# Altium PCB ASCII-romulator-pvt1.PcbDoc
Units mm, origin at the board's own origin, x right, y up, seen from the top; angles counter-clockwise.
Board outline 47.91 x 89.35 mm, 2 copper layers (Top Layer, Bottom Layer); 9 components, 64 nets, 749 pads, 102 vias.
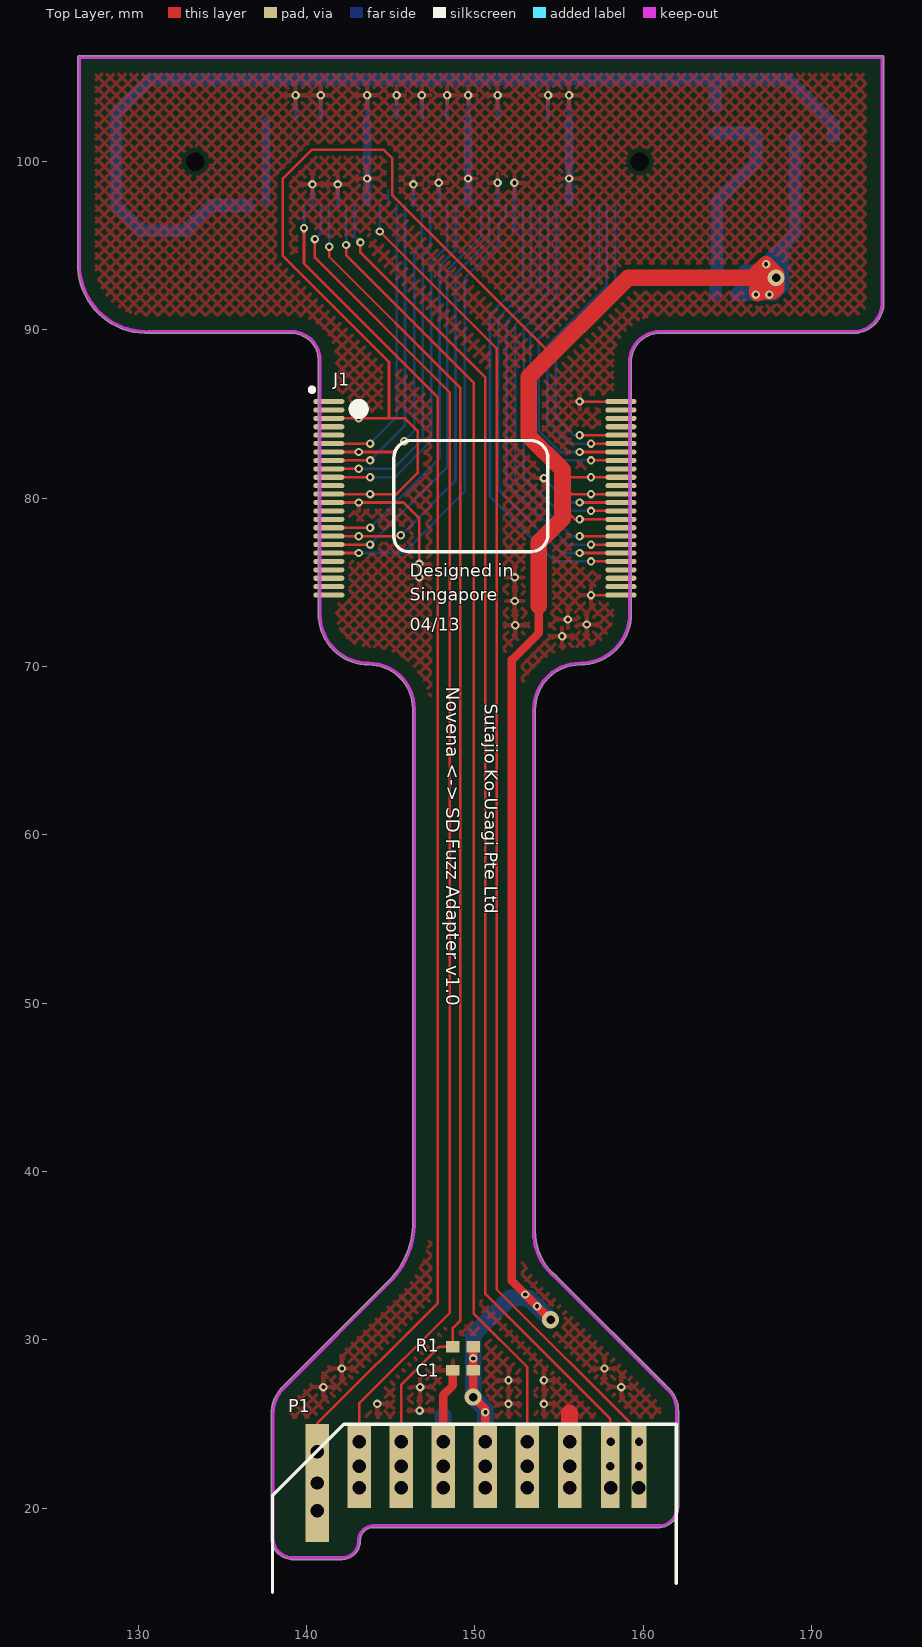
[diagram p0: Top Layer view]
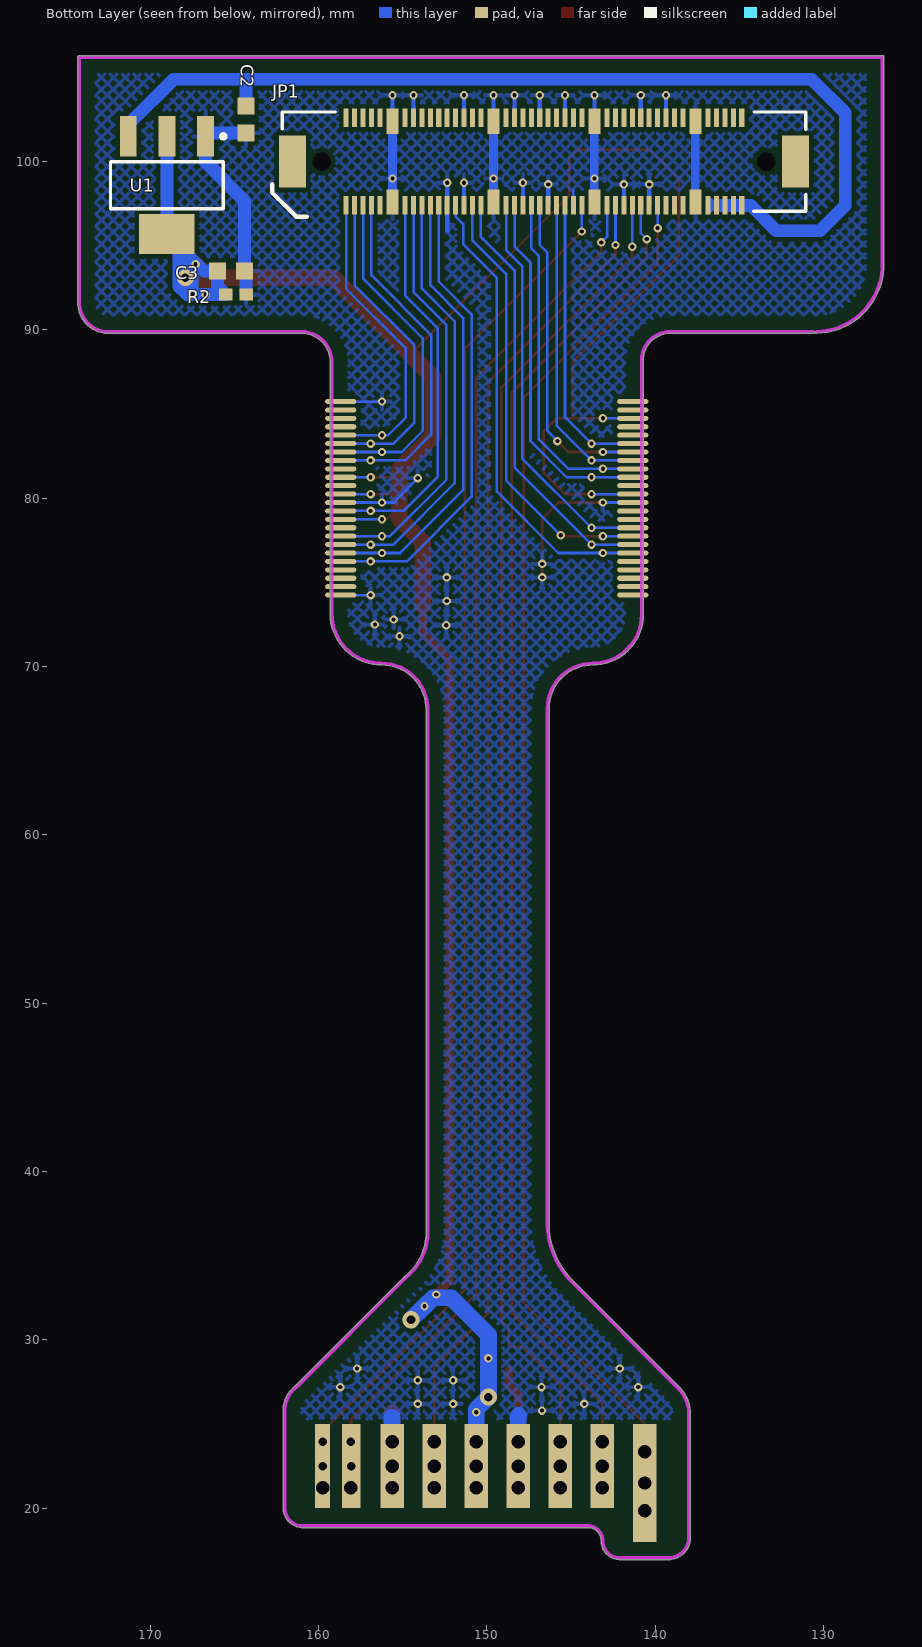
[diagram p1: Bottom Layer view, seen from below]

## Layer stack, top to bottom
Top Solder: solder mask 0.0102, Solder Resist, Dk 3.5
Top Layer: signal copper 0.0356
Dielectric1: dielectric 0.32, FR-4, Dk 4.8
Bottom Layer: signal copper 0.0356
Bottom Solder: solder mask 0.0102, Solder Resist, Dk 3.5

## Board outline
137.9,18.25 137.9,25.6 cw(c138,25.6) 137.9,25.601 cw(c140.234,25.576) 138.63,27.272 cw(c140.234,25.576) 138.631,27.273 138.629,27.271 145.027,33.669 ccw(c141.403,36.966) 146.3,36.802 146.3,67.5 ccw(c143.7,67.5) 143.7,70.1 cw(c143.7,73.1) 140.7,73.1 140.7,88.2 ccw(c139.1,88.2) 139.1,89.8 130.6,89.8 cw(c130.6,89.9) 130.5,89.891 cw(c130.4,89.9) 130.397,89.8 cw(c130.5,93.9) 126.4,94.001 cw(c130.5,93.9) 126.4,94.003 126.4,94 126.4,106.2 cw(c126.5,106.2) 126.5,106.3 174.2,106.3 cw(c174.2,106.2) 174.3,106.2 174.3,91.804 cw(c172.45,91.65) 174.307,91.65 cw(c172.45,91.65) 172.609,89.8 cw(c172.6,89.9) 172.6,89.8 161,89.8 ccw(c161,88.1) 159.3,88.1 159.3,73.15 cw(c159.2,73.15) 159.3,73.149 ccw(c156.25,73.15) 159.3,73.15 159.3,73.149 cw(c156.25,73.15) 156.251,70.1 cw(c156.25,73.15) 156.25,70.1 ccw(c156.25,70.2) 156.251,70.1 156.25,70.1 ccw(c156.25,67.45) 153.6,67.45 153.6,36.7 cw(c153.5,36.7) 153.6,36.692 cw(c157.024,36.445) 153.6,36.693 153.6,36.692 ccw(c157.024,36.445) 154.863,33.778 ccw(c157.024,36.445) 154.863,33.778 cw(c154.8,33.7) 154.871,33.771 161.367,27.275 cw(c160.195,25.771) 162.102,25.771 cw(c160.195,25.771) 162.1,25.698 162.1,20.025 cw(c160.925,20.025) 160.925,18.85 cw(c160.925,18.95) 160.924,18.85 143.929,18.85 ccw(c143.988,18.062) 143.2,18.007 cw(c143.1,18) 143.2,18 cw(c143.1,18) 143.2,17.994 cw(c142.088,18.062) 142.022,16.95 139.2,16.95 cw(c139.2,18.25)

## Design rules (kind name [scope] priority, off if disabled: settings)
AssemblyTestPointUsage [All] p0 off: scope1count=1 scope1_0_kind=Board scope1_0_value=Board scope2count=1 scope2_0_kind=Board scope2_0_value=Board commentlength=0
AssemblyTestPointUsage [All] p1 off:
AssemblyTestpoint [All] p0 off: scope1count=1 scope1_0_kind=Board scope1_0_value=Board scope2count=1 scope2_0_kind=Board scope2_0_value=Board commentlength=0
AssemblyTestpoint [All] p1 off: testpointundercomponent=TRUE minsize=1.016 maxsize=2.54 preferedsize=1.524 minholesize=0 maxholesize=1.016 preferedholesize=0.813 testpointgrid=0.025 usegrid=TRUE gridtolerance=0 allowsidetop=TRUE allowsidebottom=TRUE
Clearance Clearance_KO [All] p0: scope1count=1 scope1_0_kind=Layer scope1_0_value=TOP scope2count=1 scope2_0_kind=Board scope2_0_value=Board commentlength=0 gap=0.8
Clearance Clearance_poly_ko [All] p0 off: scope1count=1 scope1_0_kind=Board scope1_0_value=Board scope2count=1 scope2_0_kind=Layer scope2_0_value=TOP commentlength=91 gap=0.8 // Protel DXP Scope 1 Expression Was: InNamedPolygon('botgnd') or InNamedPolygon('topgnd')
Clearance Clearance_poly [All] p0 off: scope1count=1 scope1_0_kind=Board scope1_0_value=Board scope2count=1 scope2_0_kind=Board scope2_0_value=Board commentlength=91 gap=0.254 // Protel DXP Scope 1 Expression Was: InNamedPolygon('botgnd') or InNamedPolygon('topgnd')
Clearance [All] p0: scope1count=1 scope1_0_kind=Board scope1_0_value=Board scope2count=1 scope2_0_kind=Board scope2_0_value=Board commentlength=0 gap=0.152
Clearance Clearance_poly_ko [InNamedPolygon('botgnd') or InNamedPolygon('topgnd') vs OnLayer('Keep-Out Layer')] p1: gap=0.8
Clearance Clearance_poly [InNamedPolygon('botgnd') or InNamedPolygon('topgnd')] p2: gap=0.254
Clearance Clearance_KO [OnLayer('Keep-Out Layer')] p3: gap=0.8
Clearance [All] p4: gap=0.152
ComponentClearance [All] p0: scope1count=1 scope1_0_kind=Board scope1_0_value=Board scope2count=1 scope2_0_kind=Board scope2_0_value=Board commentlength=0 gap=0.254 collisioncheckmode=3
DiffPairsRouting [All] p0: scope1count=1 scope1_0_kind=Board scope1_0_value=Board scope2count=1 scope2_0_kind=Board scope2_0_value=Board commentlength=0
FabricationTestPointUsage [All] p0: scope1count=1 scope1_0_kind=Board scope1_0_value=Board scope2count=1 scope2_0_kind=Board scope2_0_value=Board commentlength=0 valid=0 allowmultiple=FALSE
FabricationTestpoint [All] p0: scope1count=1 scope1_0_kind=Board scope1_0_value=Board scope2count=1 scope2_0_kind=Board scope2_0_value=Board commentlength=0 side=3 testpointundercomponent=TRUE minsize=1.016 maxsize=2.54 preferedsize=1.524 minholesize=0 maxholesize=1.016 preferedholesize=0.813 testpointgrid=0.025
FanoutControl Fanout_Default [All] p0: scope1count=1 scope1_0_kind=Board scope1_0_value=Board scope2count=1 scope2_0_kind=Board scope2_0_value=Board commentlength=30 // Fanout_Default (Default Rule)
FanoutControl Fanout_Small [All] p0 off: scope1count=1 scope1_0_kind=Board scope1_0_value=Board scope2count=1 scope2_0_kind=Board scope2_0_value=Board commentlength=84 // Protel DXP Scope 1 Expression Was: (CompPinCount < 5)   Fanout_Small (Default Rule)
FanoutControl Fanout_SOIC [All] p0 off: scope1count=1 scope1_0_kind=Board scope1_0_value=Board scope2count=1 scope2_0_kind=Board scope2_0_value=Board commentlength=71 // Protel DXP Scope 1 Expression Was: IsSOIC   Fanout_SOIC (Default Rule)
FanoutControl Fanout_LCC [All] p0 off: scope1count=1 scope1_0_kind=Board scope1_0_value=Board scope2count=1 scope2_0_kind=Board scope2_0_value=Board commentlength=69 // Protel DXP Scope 1 Expression Was: IsLCC   Fanout_LCC (Default Rule)
FanoutControl Fanout_BGA [All] p0 off: scope1count=1 scope1_0_kind=Board scope1_0_value=Board scope2count=1 scope2_0_kind=Board scope2_0_value=Board commentlength=69 // Protel DXP Scope 1 Expression Was: IsBGA   Fanout_BGA (Default Rule)
Height [All] p0: scope1count=1 scope1_0_kind=Board scope1_0_value=Board scope2count=1 scope2_0_kind=Board scope2_0_value=Board commentlength=0
HoleSize [All] p0: scope1count=1 scope1_0_kind=Board scope1_0_value=Board scope2count=1 scope2_0_kind=Board scope2_0_value=Board commentlength=0 absolutevalues=TRUE maxlimit=3.175 minlimit=0.25 maxpercent=80.000 minpercent=20.000
HoleSize [All] p1: absolutevalues=TRUE maxlimit=3.175 minlimit=0.25 maxpercent=80.000 minpercent=20.000
HoleToHoleClearance [All] p0: scope1count=1 scope1_0_kind=Board scope1_0_value=Board scope2count=1 scope2_0_kind=Board scope2_0_value=Board commentlength=0
LayerPairs [All] p0: scope1count=1 scope1_0_kind=Board scope1_0_value=Board scope2count=1 scope2_0_kind=Board scope2_0_value=Board commentlength=0 enforce=TRUE
MinimumSolderMaskSliver [All] p0 off: scope1count=1 scope1_0_kind=Board scope1_0_value=Board scope2count=1 scope2_0_kind=Board scope2_0_value=Board commentlength=0
MinimumSolderMaskSliver [All] p1 off: minsoldermaskwidth=0.254
NetAntennae [All] p0: scope1count=1 scope1_0_kind=Board scope1_0_value=Board scope2count=1 scope2_0_kind=Board scope2_0_value=Board commentlength=0
PasteMaskExpansion [All] p0: scope1count=1 scope1_0_kind=Board scope1_0_value=Board scope2count=1 scope2_0_kind=Board scope2_0_value=Board commentlength=0 expansion=0
PlaneClearance [All] p0: scope1count=1 scope1_0_kind=Board scope1_0_value=Board scope2count=1 scope2_0_kind=Board scope2_0_value=Board commentlength=0 clearance=0.508
PlaneConnect [All] p0: scope1count=1 scope1_0_kind=Board scope1_0_value=Board scope2count=1 scope2_0_kind=Board scope2_0_value=Board commentlength=0 planeconnectstyle=Relief reliefexpansion=0.508 reliefentries=4 reliefconductorwidth=0.254 reliefairgap=0.254
PolygonConnect [All] p0: scope1count=1 scope1_0_kind=Board scope1_0_value=Board scope2count=1 scope2_0_kind=Board scope2_0_value=Board commentlength=0 connectstyle=Relief reliefconductorwidth=0.254 reliefentries=4 polygonreliefangle="90 Angle"
PolygonConnect [All] p1: connectstyle=Relief reliefconductorwidth=0.254 reliefentries=4 polygonreliefangle="90 Angle" airgapwidth=0.254
RoomDefinition nand [All] p0 off: scope1count=1 scope1_0_kind=ComponentClass scope1_0_value=nand scope2count=1 scope2_0_kind=Board scope2_0_value=Board commentlength=0 region_x1=66338583 region_y1=10600000 region_x2=66614173 region_y2=24400000 confinementstyle=ConfineIn
RoomDefinition nand [InComponentClass('nand')] p1 off: confinementstyle=ConfineIn formatcopy=TRUE lockcomponents=FALSE outline 169.2,26.924 168.5,26.924 168.5,61.976 169.2,61.976
RoutingCorners [All] p0: scope1count=1 scope1_0_kind=Board scope1_0_value=Board scope2count=1 scope2_0_kind=Board scope2_0_value=Board commentlength=0 cornerstyle=45-Degree minsetback=2.54 maxsetback=2.54
RoutingLayers [All] p0: scope1count=1 scope1_0_kind=Board scope1_0_value=Board scope2count=1 scope2_0_kind=Board scope2_0_value=Board commentlength=0 top layer=Automatic bottom layer=Automatic
RoutingPriority [All] p0: scope1count=1 scope1_0_kind=Board scope1_0_value=Board scope2count=1 scope2_0_kind=Board scope2_0_value=Board commentlength=0
RoutingTopology [All] p0: scope1count=1 scope1_0_kind=Board scope1_0_value=Board scope2count=1 scope2_0_kind=Board scope2_0_value=Board commentlength=0 topology=Shortest
RoutingVias [All] p0: scope1count=1 scope1_0_kind=Board scope1_0_value=Board scope2count=1 scope2_0_kind=Board scope2_0_value=Board commentlength=0 holewidth=0.5 width=1 viastyle="Through Hole" minholewidth=0.25 minwidth=0.5 maxholewidth=0.5 maxwidth=1
RoutingVias [All] p1: holewidth=0.5 width=1 viastyle="Through Hole" minholewidth=0.25 minwidth=0.5 maxholewidth=0.5 maxwidth=1
ShortCircuit [All] p0: scope1count=1 scope1_0_kind=Board scope1_0_value=Board scope2count=1 scope2_0_kind=Board scope2_0_value=Board commentlength=0 allowed=FALSE
SilkToBoardRegionClearance [All] p0: scope1count=1 scope1_0_kind=Board scope1_0_value=Board scope2count=1 scope2_0_kind=Board scope2_0_value=Board commentlength=0
SilkToSilkClearance [All] p0 off: scope1count=1 scope1_0_kind=Board scope1_0_value=Board scope2count=1 scope2_0_kind=Board scope2_0_value=Board commentlength=0
SilkToSilkClearance [All] p1 off: silktosilkclearance=0.254
SilkToSolderMaskClearance [All] p0 off: scope1count=1 scope1_0_kind=Board scope1_0_value=Board scope2count=1 scope2_0_kind=Board scope2_0_value=Board commentlength=44 // Protel DXP Scope 1 Expression Was: IsPad
SilkToSolderMaskClearance [IsPad] p1 off: minsilkscreentomaskgap=0.254 clearancetoexposedcopper=TRUE
SolderMaskExpansion [All] p0: scope1count=1 scope1_0_kind=Board scope1_0_value=Board scope2count=1 scope2_0_kind=Board scope2_0_value=Board commentlength=0 expansion=0.102
SolderMaskExpansion [All] p1: expansion=0.102
UnRoutedNet [All] p0: scope1count=1 scope1_0_kind=Board scope1_0_value=Board scope2count=1 scope2_0_kind=Board scope2_0_value=Board commentlength=0
Width [All] p0: scope1count=1 scope1_0_kind=Board scope1_0_value=Board scope2count=1 scope2_0_kind=Board scope2_0_value=Board commentlength=0 maxlimit=2.54 minlimit=0.127 preferedwidth=0.254
Width [All] p1: maxlimit=2.54 minlimit=0.127 preferedwidth=0.254 minimp=50.000000 maximp=50.000000 favimp=50.000000
23 further rules are at their usual default settings.

## Components (designator, comment, footprint, x,y, rotation, side; value= is the part's Value field where it differs from the comment)
C1 "0.1uF, 25V, X5R" CAPC1005N 149.3,28.2 r180 top
C2 "10uF, 10V, X5R, 20%" CAPC1608N 164.3,102.5 r270 bottom
C3 "10uF, 10V, X5R, 20%" CAPC1608N 165.2,93.5 r180 bottom
J1 "NAND footprint (DNP)" FLEX_NAND_48TSOP 150,80 r0 top
JP1 "FX10B-80P/8-SV1(**)" HRS_FX10A-80P/8-SV1(**) 146.6,100 r180 bottom
P1 "Flex soldertap (DNP)" FLEX_SD_SOLDERTAP 150,25 r0 top
R1 "10k, 1%" RESC1005N#1 149.3,29.6 r180 top
R2 "100, 1%" RESC1005N#2 164.9,92.1 r180 bottom
U1 "LM1117MP-3.3" MP04A_N 169,98.6 r270 bottom

## Footprints (in the part's own frame and the unit in brackets; to place one, negate y for a bottom-side part, rotate by r counter-clockwise, add the part's x,y. Pads: shape width x height; smd on the part's side, far side on the other; paste and mask are expansions set on the pad)
CAPC1005N [mm] "Chip Capacitor, Body 1.0x0.5mm, IPC Medium Density"
  rect 0.8x0.6 smd: 1(-0.6,0) 2(0.6,0)
CAPC1608N [mm] "Chip Capacitor, Body 1.6x0.8mm, IPC Medium Density"
  rect 1x1 smd: 1(-0.8,0) 2(0.8,0)
FLEX_NAND_48TSOP [mm] "TSSOP, 48-Leads, Body 12.00x18.40mm, Pitch 0.50mm, IPC Low Density"
  oval 1.85x0.3 smd mask+0.07: 1(-8.675,5.75) 2(-8.675,5.25) 3(-8.675,4.75) 4(-8.675,4.25) 5(-8.675,3.75) 6(-8.675,3.25) 7(-8.675,2.75) 8(-8.675,2.25) 9(-8.675,1.75) 10(-8.675,1.25) 11(-8.675,0.75) 12(-8.675,0.25) 13(-8.675,-0.25) 14(-8.675,-0.75) 15(-8.675,-1.25) 16(-8.675,-1.75) 17(-8.675,-2.25) 18(-8.675,-2.75) 19(-8.675,-3.25) 20(-8.675,-3.75) 21(-8.675,-4.25) 22(-8.675,-4.75) 23(-8.675,-5.25) 24(-8.675,-5.75) 25(8.675,-5.75) 26(8.675,-5.25) 27(8.675,-4.75) 28(8.675,-4.25) 29(8.675,-3.75) 30(8.675,-3.25) 31(8.675,-2.75) 32(8.675,-2.25) 33(8.675,-1.75) 34(8.675,-1.25) 35(8.675,-0.75) 36(8.675,-0.25) 37(8.675,0.25) 38(8.675,0.75) 39(8.675,1.25) 40(8.675,1.75) 41(8.675,2.25) 42(8.675,2.75) 43(8.675,3.25) 44(8.675,3.75) 45(8.675,4.25) 46(8.675,4.75) 47(8.675,5.25) 48(8.675,5.75)
  oval 1.85x0.3 smd far side mask+0.07: 1(-8.675,5.75) 2(-8.675,5.25) 3(-8.675,4.75) 4(-8.675,4.25) 5(-8.675,3.75) 6(-8.675,3.25) 7(-8.675,2.75) 8(-8.675,2.25) 9(-8.675,1.75) 10(-8.675,1.25) 11(-8.675,0.75) 12(-8.675,0.25) 13(-8.675,-0.25) 14(-8.675,-0.75) 15(-8.675,-1.25) 16(-8.675,-1.75) 17(-8.675,-2.25) 18(-8.675,-2.75) 19(-8.675,-3.25) 20(-8.675,-3.75) 21(-8.675,-4.25) 22(-8.675,-4.75) 23(-8.675,-5.25) 24(-8.675,-5.75) 25(8.675,-5.75) 26(8.675,-5.25) 27(8.675,-4.75) 28(8.675,-4.25) 29(8.675,-3.75) 30(8.675,-3.25) 31(8.675,-2.75) 32(8.675,-2.25) 33(8.675,-1.75) 34(8.675,-1.25) 35(8.675,-0.75) 36(8.675,-0.25) 37(8.675,0.25) 38(8.675,0.75) 39(8.675,1.25) 40(8.675,1.75) 41(8.675,2.25) 42(8.675,2.75) 43(8.675,3.25) 44(8.675,3.75) 45(8.675,4.25) 46(8.675,4.75) 47(8.675,5.25) 48(8.675,5.75)
  Top Layer lines w0.15: -8.675,-3.25 -6.9,-3.25 ; -8.675,-2.75 -6.225,-2.75 ; -8.675,-2.25 -6.9,-2.25 ; -8.675,-1.75 -6.225,-1.75 ; -8.675,-0.25 -6.9,-0.25 ; -8.675,0.25 -6.225,0.25 ; -8.675,1.25 -6.225,1.25 ; -8.675,1.75 -6.9,1.75 ; -8.675,2.25 -6.225,2.25 ; -8.675,2.75 -6.9,2.75 ; -8.675,3.25 -6.225,3.25 ; -8.675,4.75 -6.9,4.75 ; 6.225,-3.25 8.675,-3.25 ; 6.225,-2.25 8.675,-2.25 ; 6.225,-1.25 8.675,-1.25 ; 6.225,-0.25 8.675,-0.25 ; 6.225,2.75 8.675,2.75 ; 6.225,3.75 8.675,3.75 ; 6.225,5.75 8.675,5.75 ; 6.9,-5.75 8.675,-5.75 ; 6.9,-3.75 8.675,-3.75 ; 6.9,-2.75 8.675,-2.75 ; 6.9,-0.75 8.675,-0.75 ; 6.9,0.25 8.675,0.25 ; 6.9,1.25 8.675,1.25 ; 6.9,2.25 8.675,2.25 ; 6.9,3.25 8.675,3.25
  Bottom Layer lines w0.15: -8.675,-3.25 -6.9,-3.25 ; -8.675,-2.75 -6.225,-2.75 ; -8.675,-2.25 -6.9,-2.25 ; -8.675,-1.75 -6.225,-1.75 ; -8.675,-0.25 -6.9,-0.25 ; -8.675,0.25 -6.225,0.25 ; -8.675,1.25 -6.225,1.25 ; -8.675,1.75 -6.9,1.75 ; -8.675,2.25 -6.225,2.25 ; -8.675,2.75 -6.9,2.75 ; -8.675,3.25 -6.225,3.25 ; -8.675,4.75 -6.9,4.75 ; 6.225,-3.25 8.675,-3.25 ; 6.225,-2.25 8.675,-2.25 ; 6.225,-1.25 8.675,-1.25 ; 6.225,-0.25 8.675,-0.25 ; 6.225,2.75 8.675,2.75 ; 6.225,3.75 8.675,3.75 ; 6.225,5.75 8.675,5.75 ; 6.9,-5.75 8.675,-5.75 ; 6.9,-3.75 8.675,-3.75 ; 6.9,-2.75 8.675,-2.75 ; 6.9,-0.75 8.675,-0.75 ; 6.9,0.25 8.675,0.25 ; 6.9,1.25 8.675,1.25 ; 6.9,2.25 8.675,2.25 ; 6.9,3.25 8.675,3.25
  Keep-Out Layer lines w0.2: -9.2,-6.9 -9.2,6.8 ; 9.2,-6.85 9.2,6.8
  silkscreen extent -9.8,5 -6.6,6.57
FLEX_SD_SOLDERTAP [mm] "Flex PCB footprint to soldertap an SD interface"
  rect 1.4x5 hole 0.8 mask-0.025: 1(-6.875,-2.5) 2(-4.375,-2.5) 3(-1.875,-2.5) 4(0.625,-2.5) 5(3.125,-2.5) 6(5.625,-2.5)
  rect 1.1x5 hole 0.5 mask-0.025: 7(8.05,-2.5)
  rect 0.9x5 hole 0.5 mask-0.025: 8(9.75,-2.5)
  rect 1.4x7 hole 0.8 mask-0.025: 9(-9.375,-3.5)
  Keep-Out Layer lines w0.2: -12,-6.75 -12,0.6 ; -10.8,-7.95 -7.975,-7.95 ; -6.075,-6.05 10.925,-6.05 ; 12,-4.975 12,0.7
  silkscreen extent -12.03,-10 11.98,0
HRS_FX10A-80P/8-SV1(**) [mm] "10Gbps 80 pin board to board header, 5mm mating height"
  rect 1.6x3.1 smd: 0(-14.95,0) 0(14.95,0)
  round 0.5 hole 1.1 unplated: 0(-13.2,0) 0(13.2,0)
  rect 0.3x1.1 smd mask-0.025: A1(-11.75,-2.6) A2(-11.25,-2.6) A3(-10.75,-2.6) A4(-10.25,-2.6) A5(-9.75,-2.6) A6(-8.25,-2.6) A7(-7.75,-2.6) A8(-7.25,-2.6) A9(-6.75,-2.6) A10(-6.25,-2.6) A11(-5.75,-2.6) A12(-5.25,-2.6) A13(-4.75,-2.6) A14(-4.25,-2.6) A15(-3.75,-2.6) A16(-2.25,-2.6) A17(-1.75,-2.6) A18(-1.25,-2.6) A19(-0.75,-2.6) A20(-0.25,-2.6) A21(0.25,-2.6) A22(0.75,-2.6) A23(1.25,-2.6) A24(1.75,-2.6) A25(2.25,-2.6) A26(3.75,-2.6) A27(4.25,-2.6) A28(4.75,-2.6) A29(5.25,-2.6) A30(5.75,-2.6) A31(6.25,-2.6) A32(6.75,-2.6) A33(7.25,-2.6) A34(7.75,-2.6) A35(8.25,-2.6) A36(9.75,-2.6) A37(10.25,-2.6) A38(10.75,-2.6) A39(11.25,-2.6) A40(11.75,-2.6) B1(-11.75,2.6) B2(-11.25,2.6) B3(-10.75,2.6) B4(-10.25,2.6) B5(-9.75,2.6) B6(-8.25,2.6) B7(-7.75,2.6) B8(-7.25,2.6) B9(-6.75,2.6) B10(-6.25,2.6) B11(-5.75,2.6) B12(-5.25,2.6) B13(-4.75,2.6) B14(-4.25,2.6) B15(-3.75,2.6) B16(-2.25,2.6) B17(-1.75,2.6) B18(-1.25,2.6) B19(-0.75,2.6) B20(-0.25,2.6) B21(0.25,2.6) B22(0.75,2.6) B23(1.25,2.6) B24(1.75,2.6) B25(2.25,2.6) B26(3.75,2.6) B27(4.25,2.6) B28(4.75,2.6) B29(5.25,2.6) B30(5.75,2.6) B31(6.25,2.6) B32(6.75,2.6) B33(7.25,2.6) B34(7.75,2.6) B35(8.25,2.6) B36(9.75,2.6) B37(10.25,2.6) B38(10.75,2.6) B39(11.25,2.6) B40(11.75,2.6)
  rect 0.7x1.5 smd mask-0.025: GND1(-9,-2.4) GND2(-3,-2.4) GND3(3,-2.4) GND4(9,-2.4) GND5(-9,2.4) GND6(-3,2.4) GND7(3,2.4) GND8(9,2.4)
  silkscreen extent -16.15,-3.27 15.55,2.95
MP04A_N [mm] "SOT223, 4-Leads, Body 6.5x3.5mm, Pitch 2.3mm, Lead Span 7mm, IPC Medium Density"
  rect 2.4x1 smd: 1(-2.9,2.3) 2(-2.9,0) 3(-2.9,-2.3)
  rect 2.4x3.3 smd: 4(2.9,0)
  silkscreen extent -3.02,-3.35 1.4,3.47
RESC1005N#1 [mm] "Chip Resistor, Body 1.1x0.5mm, IPC Medium Density"
  rect 0.8x0.7 smd: 1(-0.6,0) 2(0.6,0)
  Mechanical 13 keep-out region: 11.5,2.4 -13,2.4 -13,0 11.5,0
RESC1005N#2 [mm] "Chip Resistor, Body 1.1x0.5mm, IPC Medium Density"
  rect 0.8x0.7 smd: 1(-0.6,0) 2(0.6,0)

## Part data
C1 C2 C3: library part "Cap Semi", "Capacitor (Semiconductor SIM Model)"
J1: library part ONFI_NAND, "ONFI compliant NAND symbol for use with flex tap"
JP1: library part HEADER_HRS_FX10A_80, "80-pin 10Gbps 5mm mated height board-to-board connector"
P1: library part "Header 9", "Flex PCB footprint"
R1 R2: library part Res1, "Resistor"
U1: "800mA Low-Dropout Linear Regulator"

## Free pads (board coordinates)
  rect 0.203x0.051 on Top Overlay: 1(145.853,78.326) 1(146.818,79.951) 1(146.869,82.339) 1(146.97,82.491) 1(147.275,81.679) 1(147.428,77.31) 1(148.088,81.374) 1(148.24,79.901) 1(148.24,82.187) 1(148.342,82.339) 1(148.393,82.39) 1(148.444,82.491) 1(148.494,82.542) 1(148.545,82.695) 1(148.596,81.729) 1(148.596,82.745) 1(148.647,81.78) 1(148.698,81.831) 1(148.748,81.882) 1(149.002,82.237) 1(149.002,82.288) 1(149.053,82.339) 1(149.104,82.441) 1(149.155,78.427) 1(149.155,82.491) 1(149.155,82.542) 1(150.323,82.136) 1(150.526,82.593) 1(151.085,82.898) 1(151.238,81.069) 1(151.238,82.745) 1(151.288,82.187) 1(151.339,82.237) 1(151.339,83.05) 1(151.39,82.288) 1(151.441,82.339) 1(151.441,82.949) 1(151.492,82.898) 1(151.898,79.901) 1(151.949,79.951) 1(151.949,81.526) 1(152,80.053) 1(152.05,82.491) 1(152.101,81.628) 1(152.152,82.339) 1(152.304,80.713) 1(152.304,81.78) 1(152.355,81.831) 1(152.406,81.882) 1(152.457,81.933) 1(152.508,81.983) 1(152.558,81.679) 1(152.558,82.034) 1(152.609,82.085) 1(152.66,82.136) 1(152.711,82.187) 1(152.863,81.425) 1(152.965,77.97) 1(153.016,79.951) 1(153.422,77.97)
  rect 0.254x0.051 on Top Overlay: 1(145.878,78.377) 1(145.929,78.427) 1(145.98,78.478) 1(145.98,81.577) 1(146.031,78.529) 1(146.031,81.628) 1(146.081,78.58) 1(146.132,78.631) 1(146.132,81.679) 1(146.183,78.681) 1(146.234,81.729) 1(146.285,78.834) 1(146.285,81.78) 1(146.335,78.885) 1(146.386,81.831) 1(146.437,81.882) 1(146.488,81.933) 1(146.539,81.983) 1(146.589,82.034) 1(146.742,82.187) 1(146.793,82.237) 1(146.843,79.901) 1(146.843,82.288) 1(146.894,82.39) 1(146.945,82.034) 1(146.945,82.441) 1(146.996,82.542) 1(147.097,81.933) 1(147.148,81.882) 1(147.199,81.831) 1(147.25,81.729) 1(147.25,81.78) 1(147.453,77.361) 1(147.605,81.018) 1(148.164,81.425) 1(148.266,81.475) 1(148.317,79.85) 1(148.317,81.526) 1(148.367,79.799) 1(148.418,79.748) 1(148.418,81.577) 1(148.469,81.628) 1(148.52,81.679) 1(148.571,82.898) 1(148.621,82.796) 1(148.621,82.847) 1(149.079,82.39) 1(149.18,78.478) 1(149.18,82.593) 1(149.942,79.393) 1(149.993,79.443) 1(150.044,77.31) 1(150.044,82.39) 1(150.247,82.237) 1(150.298,82.187) 1(150.298,82.796) 1(150.349,81.475) 1(150.45,82.695) 1(150.501,82.644) 1(150.704,78.681) 1(150.907,81.882) 1(150.958,81.933) 1(151.06,81.983) 1(151.111,82.034) 1(151.161,82.085) 1(151.161,82.847) 1(151.212,82.136) 1(151.212,82.796) 1(151.72,78.885) 1(151.771,79.139) 1(151.771,79.189) 1(151.771,79.24) 1(151.771,79.291) 1(151.771,79.342) 1(151.771,79.393) 1(151.771,79.443) 1(151.974,80.002) 1(152.025,80.104) 1(152.025,81.577) 1(152.076,80.155) 1(152.177,81.679) 1(152.228,81.729) 1(152.584,78.58) 1(152.635,81.628) 1(152.838,82.949) 1(152.939,82.847) 1(152.99,78.021) 1(153.447,77.818) 1(153.447,77.869) 1(153.447,77.919)
  rect 0.102x0.051 on Top Overlay: 1(145.904,81.526) 1(146.107,82.695) 1(146.767,80.002) 1(147.021,82.745) 1(147.986,81.933) 1(149.917,79.342) 1(150.171,81.679) 1(150.171,81.729) 1(150.628,78.631) 1(151.034,82.949) 1(151.288,82.644) 1(151.593,82.542) 1(152,82.542) 1(152.863,81.374) 1(152.965,77.919)
  rect 0.305x0.051 on Top Overlay: 1(146.208,78.732) 1(146.259,78.783) 1(146.361,78.935) 1(146.412,78.986) 1(146.462,79.037) 1(146.462,79.088) 1(146.513,79.139) 1(146.564,79.24) 1(146.615,79.291) 1(146.666,79.393) 1(147.021,81.983) 1(147.072,82.593) 1(147.631,77.818) 1(147.631,77.869) 1(147.631,77.919) 1(147.631,77.97) 1(147.631,78.021) 1(147.631,78.072) 1(147.631,78.123) 1(147.631,78.173) 1(147.631,78.224) 1(147.631,78.275) 1(147.631,78.326) 1(147.631,78.377) 1(147.631,78.427) 1(147.631,78.478) 1(147.631,78.529) 1(147.631,78.58) 1(147.631,78.631) 1(147.631,78.681) 1(147.631,78.732) 1(147.631,78.783) 1(147.631,78.834) 1(147.631,78.885) 1(147.631,78.935) 1(147.631,78.986) 1(147.631,79.037) 1(147.631,79.088) 1(147.631,79.139) 1(147.631,79.189) 1(147.631,79.24) 1(147.631,79.291) 1(147.631,79.342) 1(147.631,79.393) 1(147.631,79.443) 1(147.631,79.494) 1(147.631,79.545) 1(147.631,79.596) 1(147.631,79.647) 1(147.631,79.697) 1(147.631,79.748) 1(147.631,79.799) 1(147.631,79.85) 1(147.631,79.901) 1(147.631,79.951) 1(147.631,80.002) 1(147.631,80.053) 1(147.631,80.104) 1(147.631,80.155) 1(147.631,80.205) 1(147.631,80.256) 1(147.631,80.307) 1(147.631,80.358) 1(147.631,80.409) 1(147.631,80.459) 1(147.631,80.51) 1(147.631,80.561) 1(147.631,80.612) 1(147.631,80.663) 1(147.631,80.713) 1(147.631,80.764) 1(148.444,79.697) 1(148.494,79.647) 1(148.545,79.596) 1(148.901,82.034) 1(148.901,82.085) 1(149.155,78.529) 1(150.069,79.494) 1(150.12,79.545) 1(150.222,82.288) 1(150.323,79.697) 1(150.628,80.002) 1(150.628,81.679) 1(150.679,81.729) 1(150.73,78.732) 1(150.73,78.783) 1(150.73,78.834) 1(150.73,78.885) 1(150.73,79.037) 1(150.73,79.088) 1(150.73,79.139) 1(150.73,79.189) 1(150.73,79.24) 1(150.73,79.291) 1(150.73,79.342) 1(150.73,79.393) 1(150.73,79.443) 1(150.73,79.494) 1(150.73,79.545) 1(150.73,79.596) 1(150.73,79.647) 1(150.73,79.697) 1(150.78,81.78) 1(150.831,81.831) 1(151.39,82.999) 1(151.492,78.224) 1(151.542,78.326) 1(151.593,78.427) 1(151.593,78.478) 1(151.644,78.529) 1(151.644,78.58) 1(151.644,78.631) 1(151.695,78.681) 1(151.695,78.732) 1(151.695,78.783) 1(151.695,78.834) 1(151.746,79.037) 1(151.746,79.088) 1(151.796,79.494) 1(151.796,79.545) 1(151.796,79.596) 1(151.796,79.647) 1(151.796,79.697) 1(152.101,77.818) 1(152.101,77.869) 1(152.101,77.919) 1(152.101,77.97) 1(152.101,78.021) 1(152.101,78.072) 1(152.101,78.123) 1(152.101,78.173) 1(152.101,78.224) 1(152.101,78.275) 1(152.101,78.326) 1(152.101,78.377) 1(152.101,78.427) 1(152.101,78.478) 1(152.101,78.529) 1(152.101,78.58) 1(152.101,78.631) 1(152.101,78.681) 1(152.101,78.732) 1(152.101,78.783) 1(152.101,78.834) 1(152.101,78.885) 1(152.101,80.205) 1(152.152,80.256) 1(152.304,80.663) 1(152.863,81.475) 1(152.863,82.339) 1(152.863,82.39) 1(152.965,78.072) 1(152.965,78.123) 1(153.016,78.783) 1(153.016,78.834) 1(153.016,78.885) 1(153.016,79.037) 1(153.016,79.088) 1(153.016,79.139) 1(153.016,79.189) 1(153.016,79.24) 1(153.016,79.291) 1(153.016,79.342) 1(153.016,79.393) 1(153.016,79.443) 1(153.016,79.494) 1(153.016,79.545) 1(153.016,79.596) 1(153.016,79.647) 1(153.016,79.697) 1(153.016,79.901) 1(153.473,82.542)
  rect 0.152x0.051 on Top Overlay: 1(146.285,82.491) 1(147.301,81.628) 1(147.555,81.069) 1(148.012,81.983) 1(148.063,82.034) 1(148.113,82.085) 1(148.164,82.136) 1(148.215,79.951) 1(148.266,82.237) 1(148.418,82.441) 1(148.52,82.949) 1(149.18,78.377) 1(149.18,82.745) 1(150.349,81.425) 1(150.552,82.542) 1(151.212,81.12) 1(151.263,82.695) 1(151.466,82.39) 1(151.517,82.441) 1(151.517,82.847) 1(151.568,82.491) 1(152.533,78.631) 1(152.939,78.732) 1(152.939,81.628) 1(152.939,81.679) 1(152.939,81.729) 1(152.939,81.78) 1(152.939,81.831) 1(152.939,81.882) 1(152.939,81.933) 1(152.939,81.983) 1(152.939,82.034) 1(152.939,82.085) 1(152.939,82.136) 1(152.939,82.187) 1(152.939,82.542) 1(152.939,82.593) 1(152.939,82.644) 1(152.939,82.695) 1(152.939,82.745) 1(152.939,82.796) 1(152.99,80.002) 1(153.447,78.021) 1(153.447,78.072) 1(153.447,78.123) 1(153.447,78.173) 1(153.447,78.224) 1(153.447,78.275) 1(153.447,78.326) 1(153.447,78.377) 1(153.447,78.427)
  rect 0.406x0.051 on Top Overlay: 1(146.31,82.542) 1(146.716,79.494) 1(146.767,79.596) 1(146.818,79.647) 1(146.97,82.695) 1(147.021,77.767) 1(147.478,77.462) 1(147.682,80.866) 1(148.596,82.593) 1(148.698,79.443) 1(148.748,79.393) 1(148.799,79.342) 1(148.85,79.291) 1(148.85,81.933) 1(148.85,82.136) 1(148.901,79.189) 1(148.901,81.983) 1(149.155,78.631) 1(149.155,78.681) 1(149.155,78.732) 1(150.374,81.526) 1(150.984,77.716) 1(151.085,77.767) 1(151.085,80.663) 1(151.136,77.818) 1(151.136,80.713) 1(151.187,77.869) 1(151.187,80.764) 1(151.288,80.967) 1(152.152,77.716) 1(152.203,77.665) 1(152.304,80.612) 1(152.762,78.427) 1(152.812,78.377) 1(152.812,81.577) 1(152.812,82.237) 1(152.863,78.326) 1(152.914,78.224) 1(152.914,78.275) 1(153.473,77.716)
  rect 0.762x0.051 on Top Overlay: 1(146.488,82.593) 1(147.402,77.615)
  rect 0.356x0.051 on Top Overlay: 1(146.539,79.189) 1(146.64,79.342) 1(146.691,79.443) 1(146.742,79.545) 1(146.742,82.136) 1(146.843,79.85) 1(147.453,77.411) 1(147.605,77.767) 1(147.656,80.815) 1(147.656,80.967) 1(148.621,79.545) 1(148.621,82.237) 1(148.672,79.494) 1(149.18,78.58) 1(150.095,82.339) 1(150.196,79.596) 1(150.247,79.647) 1(150.349,82.745) 1(150.603,79.951) 1(150.653,80.053) 1(150.704,80.104) 1(150.755,80.155) 1(150.806,80.205) 1(150.806,80.256) 1(150.857,80.307) 1(150.907,80.358) 1(150.907,80.409) 1(150.958,80.459) 1(151.06,80.612) 1(151.263,77.919) 1(151.263,81.018) 1(151.314,77.97) 1(151.365,78.021) 1(151.365,78.072) 1(151.415,78.123) 1(151.466,78.173) 1(151.517,78.275) 1(151.568,78.377) 1(152.127,77.767) 1(152.177,80.307) 1(152.228,80.358) 1(152.635,78.529) 1(152.685,78.478) 1(152.838,81.526) 1(152.838,82.288) 1(152.889,82.898) 1(152.939,78.173) 1(153.447,77.767)
  rect 1.118x0.051 on Top Overlay: 1(146.615,82.644)
  rect 0.508x0.051 on Top Overlay: 1(146.767,82.085) 1(146.869,79.697) 1(146.869,79.748) 1(148.444,82.288) 1(148.799,82.187) 1(150.272,77.411) 1(150.374,81.577) 1(150.425,77.462) 1(150.577,77.513) 1(151.288,80.917) 1(152.355,80.459) 1(153.473,77.665)
  rect 0.457x0.051 on Top Overlay: 1(146.894,79.799) 1(147.707,80.917) 1(148.875,79.24) 1(148.926,79.139) 1(148.977,79.088) 1(149.028,78.986) 1(149.028,79.037) 1(149.079,78.885) 1(149.079,78.935) 1(149.129,78.783) 1(149.129,78.834) 1(150.145,77.361) 1(150.603,79.901) 1(150.704,77.564) 1(150.806,77.615) 1(150.907,77.665) 1(151.212,80.815) 1(151.263,80.866) 1(152.279,80.409)
  rect 0.965x0.051 on Top Overlay: 1(147.301,77.716)
  rect 0.914x0.051 on Top Overlay: 1(147.326,77.665) 1(148.901,82.644)
  rect 0.61x0.051 on Top Overlay: 1(147.428,77.564) 1(149.053,82.695) 1(150.425,81.628) 1(152.304,82.39)
  rect 0.559x0.051 on Top Overlay: 1(147.453,77.513)
  rect 0.051x0.051 on Top Overlay: 1(148.063,81.323) 1(148.215,80.002) 1(151.517,82.796) 1(151.923,81.475) 1(152.279,80.764) 1(152.533,81.729)
  rect 1.727x0.051 on Top Overlay: 1(151.695,80.561) 1(152.863,77.615)
  rect 2.997x0.051 on Top Overlay: 1(151.72,79.748) 1(151.771,79.799)
  rect 1.778x0.051 on Top Overlay: 1(151.72,80.51) 1(152.838,82.441)
  rect 2.946x0.051 on Top Overlay: 1(151.796,79.85)
  rect 2.591x0.051 on Top Overlay: 1(151.873,78.935) 1(151.873,78.986)
  rect 1.372x0.051 on Top Overlay: 1(152.838,77.411)
  rect 1.473x0.051 on Top Overlay: 1(152.838,77.462)
  rect 1.676x0.051 on Top Overlay: 1(152.838,77.564)
  rect 1.626x0.051 on Top Overlay: 1(152.863,77.513)
  rect 1.27x0.051 on Top Overlay: 1(153.041,82.491)

## Via types
v1: diameter 0.5, hole 0.25, Top Layer to Bottom Layer, tented both sides, 81 vias
v2: diameter 1, hole 0.8, Top Layer to Bottom Layer, 14 vias
v3: diameter 1.016, hole 0.508, Top Layer to Bottom Layer, tented both sides, 2 vias
v4: diameter 0.6, hole 0.5, Top Layer to Bottom Layer, 2 vias
v5: diameter 0.8, hole 0.8, Top Layer to Bottom Layer, 2 vias
v6: diameter 1, hole 0.5, Top Layer to Bottom Layer, tented both sides, 1 vias

## Nets (pads, with @x,y where several pads share a name; then routed paths per layer and width w, separated by ;. In a path a pad name is that pad's centre, name@x,y a point inside that pad or via, vN(x,y) a via of type N, cw(c..) or ccw(c..) an arc to the next point about the centre after c; other vN are vias at no path point)
DDC_SCL: JP1.B3
DDC_SDA: JP1.A5
F_DX0: J1.44 JP1.A1 | length 15.9
  Bottom Layer w0.15: v1(156.225,83.75) 155.85,83.75 154.8,84.8 154.8,88.9 158.35,92.45 JP1.A1
F_DX1: J1.31 JP1.A8 | length 23.8
  Bottom Layer w0.15: JP1.A8 153.85,92.464 151.9,90.514 151.9,80.9 155.55,77.25 v1(156.9,77.25)
F_DX2: J1.42 JP1.A3 | length 17.8
  Bottom Layer w0.15: v1(156.225,82.75) 155.05,82.75 153.8,84 153.8,89.5 157.35,93.05 JP1.A3
F_DX3: J1.43 JP1.A2 | length 17.5
  Bottom Layer w0.15: v1(156.9,83.25) 155.55,83.25 154.3,84.5 154.3,89.1 157.85,92.65 JP1.A2
F_DX4: JP1.B2
F_DX5: JP1.B1
F_DX6: JP1.B39
F_DX7: JP1.B37
F_DX8: JP1.B6
F_DX11: J1.41 JP1.A4 | length 19.3
  Bottom Layer w0.15: JP1.A4 156.85,93.257 153.3,89.707 153.3,83.793 154.843,82.25 v1(156.9,82.25)
F_DX12: JP1.B38
F_DX13: JP1.B40
F_DX14: JP1.A25 P1.8 | length 79.8
  Top Layer w0.15: v1(144.35,95.85) 151.3,88.9 151.3,76.75 151.3,33 159.75,24.55 v4(159.75,23.95)
  Bottom Layer w0.15: v1(144.35,95.85) JP1.A25
  other v5: 159.75,21.225
F_DX15: JP1.B36
F_DX16: JP1.B10
F_DX17: J1.19 JP1.A12 | length 25.8
  Bottom Layer w0.15: v1(143.1,76.75) 145.75,76.75 149.4,80.4 149.4,93.1 151.4,95.1 151.4,96.3 151.85,96.75 JP1.A12
F_DX18: JP1.B16
F_LVDS0_N: J1.7 JP1.A20 | length 17.4
  Top Layer w0.15: v1(143.1,82.75) 145.15,82.75 v1(145.8,83.4)
  Bottom Layer w0.15: v1(145.8,83.4) 146.4,84 146.4,94.607 146.85,95.057 JP1.A20
F_LVDS0_P: J1.9 JP1.A19 | length 18.6
  Bottom Layer w0.15: v1(143.1,81.75) 145.15,81.75 146.9,83.5 146.9,94.4 147.35,94.85 JP1.A19
F_LVDS1_N: JP1.A30 P1.1 | length 80.6
  Top Layer w0.15: v1(140.5,95.4) 140.5,94.3 148.507,86.293 148.507,75.593 148.507,31.607 143.125,26.225 v2(143.125,23.95) P1.1
  Bottom Layer w0.15: v1(140.5,95.4) 140.85,95.75 JP1.A30
  other v2: 143.125,21.225
F_LVDS1_P: JP1.A29 P1.2 R1.2 | length 81.3
  Top Layer w0.15: v1(141.35,94.95) 141.35,94.35 149.144,86.556 149.144,75.856 149.144,31.144 148.7,30.7 R1.2 147.9,29.6 145.625,27.325 v2(145.625,23.95) P1.2 v2(145.625,21.225)
  Bottom Layer w0.15: v1(141.35,94.95) JP1.A29
F_LVDS2_N: JP1.A32 P1.9 | length 80.3
  Top Layer w0.15: v1(139.85,96.05) 139.85,93.95 147.8,86 147.8,75.3 147.8,32.2 140.625,25.025 v2(140.625,23.35)
  Bottom Layer w0.15: v1(139.85,96.05) JP1.A32
  other v2: 140.625,19.85
F_LVDS2_P: JP1.A33
F_LVDS3_N: JP1.B31
F_LVDS3_P: JP1.B32
F_LVDS4_N: JP1.A27 P1.5 | length 79.4
  Top Layer w0.15: v1(142.35,95.05) 142.35,94.45 149.921,86.879 149.921,31.579 153.125,28.375 v2(153.125,23.95) P1.5
  Bottom Layer w0.15: v1(142.35,95.05) JP1.A27
  other v2: 153.125,21.225
F_LVDS4_P: JP1.A26 P1.7 | length 81.2
  Top Layer w0.15: v1(143.2,95.2) 143.2,94.6 150.628,87.172 150.628,76.472 150.628,32.715 158.05,25.294 P1.7
  Bottom Layer w0.15: JP1.A26 142.85,95.55 v1(143.2,95.2)
  other v4: 158.075,23.95
  other v5: 158.075,21.225
F_LVDS5_N: JP1.B27
F_LVDS5_P: JP1.B26
F_LVDS6_N: JP1.B28
F_LVDS6_P: JP1.B29
F_LVDS7_N: JP1.B35
F_LVDS7_P: JP1.B34
F_LVDS8_N: JP1.B25
F_LVDS8_P: JP1.B24
F_LVDS9_N: JP1.B22
F_LVDS9_P: JP1.B21
F_LVDS10_N: JP1.B15
F_LVDS10_P: JP1.B14
F_LVDS11_N: J1.32 JP1.A7 | length 22.3
  Bottom Layer w0.15: JP1.A7 154.35,92.257 152.4,90.307 152.4,81.1 155.75,77.75 v1(156.225,77.75)
F_LVDS11_P: J1.35 JP1.A6 | length 21.8
  Bottom Layer w0.15: JP1.A6 154.85,92.05 152.9,90.1 152.9,81.3 154.95,79.25 v1(156.9,79.25)
F_LVDS12_N: JP1.B12
F_LVDS12_P: JP1.B11
F_LVDS13_N: JP1.B9
F_LVDS13_P: JP1.B8
F_LVDS14_N: JP1.B5
F_LVDS14_P: JP1.B4
F_LVDS15_N: J1.10 JP1.A17 | length 18.9
  Bottom Layer w0.15: v1(143.775,81.25) 145.25,81.25 147.4,83.4 147.4,94.007 148.35,94.957 JP1.A17
F_LVDS15_P: J1.16 JP1.A16 | length 21.3
  Bottom Layer w0.15: v1(143.775,78.25) 147.9,82.375 147.9,93.8 148.85,94.75 JP1.A16
F_LVDS_CK0_N: JP1.B19
F_LVDS_CK0_P: JP1.B18
F_LVDS_CK1_N: J1.6 JP1.A23 | length 14.8
  Bottom Layer w0.15: v1(143.775,83.25) 145.35,84.825 JP1.A23
F_LVDS_CK1_P: J1.8 JP1.A22 | length 16
  Bottom Layer w0.15: v1(143.775,82.25) 145.85,84.325 JP1.A22
F_LVDSA_N: JP1.A35
F_LVDSA_P: JP1.A34
F_LVDSB_N: J1.17 JP1.A14 | length 24.3
  Top Layer w0.15: v1(143.1,77.75) 145.55,77.75 v1(145.6,77.8)
  Bottom Layer w0.15: v1(145.6,77.8) 148.85,81.05 148.85,93.328 150.85,95.328 JP1.A14
F_LVDSB_P: J1.18 JP1.A15 | length 22.9
  Bottom Layer w0.15: v1(143.775,77.25) 148.35,81.825 148.35,93.535 150.35,95.535 JP1.A15
F_LVDSC_N: J1.30 JP1.A9 | length 24.1
  Bottom Layer w0.15: JP1.A9 153.35,92.671 151.4,90.721 151.4,80.5 155.15,76.75 v1(156.225,76.75)
F_LVDSC_P: J1.29 JP1.A10 | length 25.7
  Bottom Layer w0.15: JP1.A10 152.85,92.878 150.9,90.928 150.9,80.1 154.75,76.25 v1(156.9,76.25)
GND: C1.2 C2.2 C3.2 J1.13 J1.25 J1.36 J1.48 JP1.A11 JP1.A13 JP1.A18 JP1.A21 JP1.A24 JP1.A28 JP1.A31 JP1.B7 JP1.B13 JP1.B17 JP1.B20 JP1.B23 JP1.B30 JP1.B33 JP1.GND1 JP1.GND2 JP1.GND3 JP1.GND4 JP1.GND5 JP1.GND6 JP1.GND7 JP1.GND8 P1.3 P1.6 R2.2 U1.1 | length 80.9
  Top Layer w0.15: v1(143.1,79.75) 145.75,79.75 146.7,78.8 v1(146.7,75.3)
  Top Layer w0.508: P1.3 148.125,26.725 148.7,27.3 C1.2
  Top Layer w1: P1.6 v2(155.625,23.95) 155.625,25.675
  Bottom Layer w0.15: JP1.A24 144.85,98.3 144.854,98.304 ; v1@154,81.3 155.55,79.75 v1(156.225,79.75)
  Bottom Layer w0.254: JP1.B33 v1(139.35,103.95) ; JP1.A31 v1(140.35,98.65) ; JP1.B30 v1(140.85,103.95) ; JP1.A28 v1(141.85,98.65) ; JP1.GND7@143.6,102.6 v1(143.6,103.95) ; JP1.B23 v1(145.35,103.95) ; JP1.A21 v1(146.35,98.65) ; JP1.B20 v1(146.85,103.95) ; JP1.A18 v1(147.85,98.75) ; JP1.B17 v1(148.35,103.95) ; JP1.GND6@149.6,102.6 v1(149.6,103.95) ; JP1.A13 v1(151.35,98.75) ; JP1.B13 v1(151.35,103.95) ; 152.3,95.894 152.35,95.944 JP1.A11 v1(152.35,98.75) ; JP1.B7 v1(154.35,103.95) ; JP1.GND5@155.6,102.6 v1(155.6,103.95)
  Bottom Layer w0.508: JP1.GND4 JP1.GND8 ; JP1.GND3 JP1.GND7 ; JP1.GND2 JP1.GND6 ; JP1.GND1 JP1.GND5
  Bottom Layer w0.762: R2.2 164.3,93.4 C3.2 164.4,97.7 166.7,100 U1.1 ; C2.2 U1.1@166.5,101.7
  Bottom Layer w1: 148.1,25.5 148.125,25.475 P1.3 ; P1.6 v2(155.625,23.95) 155.625,25.394
  other v1: 146.715,25.8 144.2,26.2 152,26.2 154.1,26.2 141,27.2 146.748,27.2 158.7,27.2 152,27.6 154.1,27.6 142.1,28.3 157.7,28.3 155.181,71.8 152.4,72.46 156.646,72.5 155.531,72.8 152.374,73.9 156.9,74.25 152.374,75.3 146.7,76.1 154.1,81.2 156.225,85.75 143.6,99 149.6,99 155.6,99
  other v2: 148.125,21.225 155.625,21.225 148.125,23.95
P3.3V: C1.1 C3.1 J1.3 J1.12 J1.34 J1.37 J1.39 P1.4 R1.1 R2.1 U1.2 U1.4 | length 180.4
  Top Layer w0.15: v1(143.1,84.75) 144.9,84.75 ; v1(143.775,80.25) 145.35,80.25 146.6,81.5 146.6,84 145.85,84.75 144.9,84.75 ; 154.55,88.55 145.1,98 145.1,100.2 144.6,100.7 140.3,100.7 138.6,99 138.6,94.4 144.9,88.1 144.9,84.75 ; 155.2,81.7 155.65,81.25 ; v1(156.225,78.75) 155.95,78.75 155.5,79.2 155.5,80 155.75,80.25 ; v1(156.9,80.25) 155.75,80.25 ; v1(156.9,81.25) 155.65,81.25 ; 155.65,81.25 155.5,81.1 155.5,80.5 155.75,80.25
  Top Layer w0.5: 153.8,73.6 153.8,72 152.2,70.4 152.2,33.5 v1(153.7,32) v3(154.5,31.2)
  Top Layer w0.508: R1.1 v1(149.9,28.9) v3(149.9,26.6) 150.625,25.875 v1(150.625,25.7) v2(150.625,23.95) P1.4
  Top Layer w1: 153.8,73.6 153.8,77.4 155.2,78.8 155.2,81.7 153.2,83.7 153.2,87.2 159.1,93.1 166.8,93.1 ; 166.8,93.1 v6(167.9,93.1) ; 166.8,93.1 166.8,92.2 166.9,92.3 167.7,92.3 167.9,92.5 v6(167.9,93.1) ; 166.8,93.1 166.8,93.4 v1(167.3,93.9) 167.9,93.3 v6(167.9,93.1)
  Bottom Layer w0.762: v1(167.3,93.9) 167.5,93.7 v1(167.5,92.1) ; U1.2 U1.4 ; v1(167.5,92.1) 167.9,92.5 v6(167.9,93.1) 167.9,93.9 167.55,94.25 ; v1(167.5,92.1) 167.8,92.1 168.3,92.6 U1.4@168.3,95 ; v1(167.5,92.1) R2.1 166,92.6 C3.1 166.8,93.5 167.55,94.25 ; 167.55,94.25 U1.4@168.3,95 ; U1.4@168.3,95 U1.4 ; U1.4@168.3,95 U1.4
  Bottom Layer w1: P1.4 v2(150.625,23.95) v1(150.625,25.7) 150.625,25.875 v3(149.9,26.6) v1(149.9,28.9) 149.9,30.3 152.1,32.5 v1@152.9,32.5 ; 152.8,32.5 153.2,32.5 v1(153.7,32) v3(154.5,31.2)
  other v1: 153,32.7 166.7,92.1
  other v2: 150.625,21.225
P5.0V: C2.1 JP1.A36 JP1.A37 JP1.A38 JP1.A39 JP1.A40 U1.3 | length 62.8
  Bottom Layer w0.254: JP1.A36@136.7,97.1 JP1.A36@136.7,97.4 ; JP1.A36 JP1.A36@136.7,97.4 ; JP1.A36@136.7,97.4 JP1.A37 136.65,97.7 136.7,97.7 JP1.A36@136.7,97.4
  Bottom Layer w0.762: JP1.A37 JP1.A38 JP1.A39 JP1.A40 134.3,97.4 132.8,95.9 130.2,95.9 128.7,97.4 128.7,102.9 130.7,104.9 164.3,104.9 ; C2.1 164.3,104.9 ; U1.3 171.3,102.2 168.6,104.9 164.3,104.9
pads on no net: J1.1 J1.2 J1.4 J1.5 J1.11 J1.14 J1.15 J1.20 J1.21 J1.22 J1.23 J1.24 J1.26 J1.27 J1.28 J1.33 J1.38 J1.40 J1.45 J1.46 J1.47 JP1.0

## Polygon pours and split planes (outlines as drawn)
GND on Top Layer "topgnd" (hatched 45Degree grid 0.5 track 0.2, remove dead copper, pour order 4): 127.2,106.456 173.9,106.456 176,104.592 176,38.007 161.8,25.4 136.1,25.4 133.7,27.531 124.8,35.432 124.8,104.414 124.8,104.592 127.4,106.9
GND on Bottom Layer "botgnd" (hatched 45Degree grid 0.5 track 0.2, remove dead copper, pour order 2): 135.1,25.3 162.2,25.3 166.9,29.561 176.4,38.175 176.4,105.904 171,110.8 167.7,110.8 126.3,110.8 120.9,105.904 120.9,38.266 134.6,25.844

## Keep-outs
Keep-Out Layer:
  lines w0.2: 130.4,89.9 cw(c130.5,93.9) 126.5,94 126.5,106.2 166.6,106.2 174.2,106.2 174.2,91.8 cw(c172.45,91.65) 172.6,89.9 165.3,89.9 161,89.9 ccw(c161,88.1) 159.2,88.1 159.2,86.8 ; 130.6,89.9 139.1,89.9 cw(c139.1,88.2) 140.8,88.2 140.8,86.8 ; 138,18.25 ccw(c139.2,18.25) 139.2,17.05 ; 138,25.6 cw(c140.234,25.576) 138.7,27.2 145.1,33.6 ccw(c141.403,36.966) 146.4,36.8 146.4,67.5 ccw(c143.7,67.5) 143.7,70.2 cw(c143.7,73.1) 140.8,73.1 ; 142.025,17.05 ccw(c142.088,18.062) 143.1,18 cw(c143.988,18.062) 143.925,18.95 ; 159.2,73.15 cw(c156.25,73.15) 156.25,70.2 ccw(c156.25,67.45) 153.5,67.45 153.5,36.7 ccw(c157.024,36.445) 154.8,33.7 161.3,27.2 cw(c160.195,25.771) 162,25.7 ; 160.925,18.95 ccw(c160.925,20.025) 162,20.025

## Silkscreen, mask and mechanical layers (free items; w line width, h text height)
Top Overlay:
  lines w0.2: 145.192,77.694 ccw(c146.06,77.694) 146.06,76.827 153.32,76.827 ccw(c153.32,77.843) 154.336,77.843 154.336,82.415 ccw(c153.32,82.415) 153.32,83.431 146.208,83.431 ccw(c146.208,82.415) 145.192,82.415 145.192,77.694
  text "Designed in" at 146.125,75.325 h0.76
  text "Singapore" at 146.125,73.925 h0.76
  text "04/13" at 146.125,72.125 h0.76
  text "Novena <-> SD Fuzz Adapter v1.0" at 148.3,68.8 h0.8 r270
  text "Sutajio Ko-Usagi Pte Ltd" at 150.6,67.8 h0.76 r270
Top Solder:
  rectangle: 126.6,88.2 174.2,106.2
  rectangle: 143.7,73.1 156.2,88.2
  rectangle: 140.8,29.3 159.3,73.1
  rectangle: 137.9,27.1 162.4,29.5
  text "No soldermask in coverlay area" at 178.8,93.6 h1.52
Bottom Solder:
  rectangle: 126.6,88.2 162.6,94
  rectangle: 143.8,73 156.2,88.2
  rectangle: 140.8,27.2 159.3,73
  text "No soldermask in coverlay area" at 178.8,93.6 h1.52
Mechanical 1:
  text "Kapton thickness: 0.1mm or thinnest possible" at 175.7,72.2 h1.52
  text "Copper: 0.5 oz finished" at 175.7,68.4 h1.52
  text "Plating: immersion gold" at 175.7,64.3 h1.52
  text "Coverlay + soldermask - note no soldermask where coverlay is added" at 175.9,60.1 h1.52
  text "Soldermask & coverlay color: clear" at 175.9,55.7 h1.52
  text "Silkscreen color: white" at 176.1,51.4 h1.52
  text "Stiffener to 0.5mm thick in indicated regions" at 175.8,47.5 h1.52
  text "Note: if 0.5mm is not standard thickness please suggest closest standard thickness for stiffener" at 178.6,42.9 h1.52
Mechanical 2:
  circle w0.2: c159.8,100 r1.5
  circle w0.2: c133.4,100 r1.5
  lines w0.2: 174.35,106.25 176.4,108.3 176.4,109.1 ; 126.5,93.7 128.3,91.9 174.2,91.9 174.2,106.2 126.5,106.2 126.5,93.7
  text "Add stiffener to 0.5mm thick" at 176,109.8 h1.52
Mechanical 3:
  circle w0.2: c159.8,100 r1.5
  circle w0.2: c133.4,100 r1.5
  lines w0.2: 174.9,99.1 178.3,102.5 181.7,102.5 ; 143.7,88.2 143.7,73.1 140.8,73.1 ccw(c143.7,73.1) 143.7,70.2 cw(c143.7,67.5) 146.4,67.5 146.4,36.8 cw(c141.403,36.966) 145.1,33.6 138.7,27.2 147.5,27.2 147.5,30.5 151.5,30.5 151.5,27.2 161.3,27.2 154.8,33.7 cw(c157.024,36.445) 153.5,36.7 153.5,67.45 cw(c156.25,67.45) 156.25,70.2 ccw(c156.25,73.15) 159.2,73.15 156.25,73.15 156.2,73.2 156.2,88.1 159.2,88.1 cw(c161,88.1) 161,89.9 165.3,89.9 172.6,89.9 ccw(c172.45,91.65) 174.2,91.8 174.2,106.2 166.6,106.2 126.5,106.2 126.5,94 ccw(c130.5,93.9) 130.4,89.9 139.1,89.9 cw(c139.1,88.2) 140.8,88.2 143.7,88.2 ; 143.7,88.2 143.7,88.2
  text "Top coverlay outline" at 180.4,103.7 h1.52
Mechanical 4:
  lines w0.2: 162.6,93.9 162.6,89.9 161,89.9 ccw(c161,88.1) 159.2,88.1 156.2,88.1 156.2,73.2 156.25,73.15 159.2,73.15 cw(c156.25,73.15) 156.25,70.2 ccw(c156.25,67.45) 153.5,67.45 153.5,36.7 ccw(c157.024,36.445) 154.8,33.7 161.3,27.2 147.5,27.2 138.7,27.2 145.1,33.6 ccw(c141.403,36.966) 146.4,36.8 146.4,67.5 ccw(c143.7,67.5) 143.7,70.2 cw(c143.7,73.1) 140.8,73.1 143.7,73.1 143.7,88.2 ; 162.6,94 126.5,94 ccw(c130.5,93.9) 130.4,89.9 139.1,89.9 cw(c139.1,88.2) 140.8,88.2 143.7,88.2 ; 163.4,89.6 167.6,85.4 167.6,82.8 ; 143.7,88.2 143.7,88.2
  text "Bottom coverlay outline" at 166.9,80.7 h1.52